# Altium PCB aig2_main.PcbDoc
Units mm, origin at the board's own origin, x right, y up, seen from the top; angles counter-clockwise.
Board outline 97 x 77 mm, 2 copper layers (Top Layer, Bottom Layer); 41 components, 63 nets, 298 pads, 0 vias.
Unrouted connection lines stored in the file: 148.
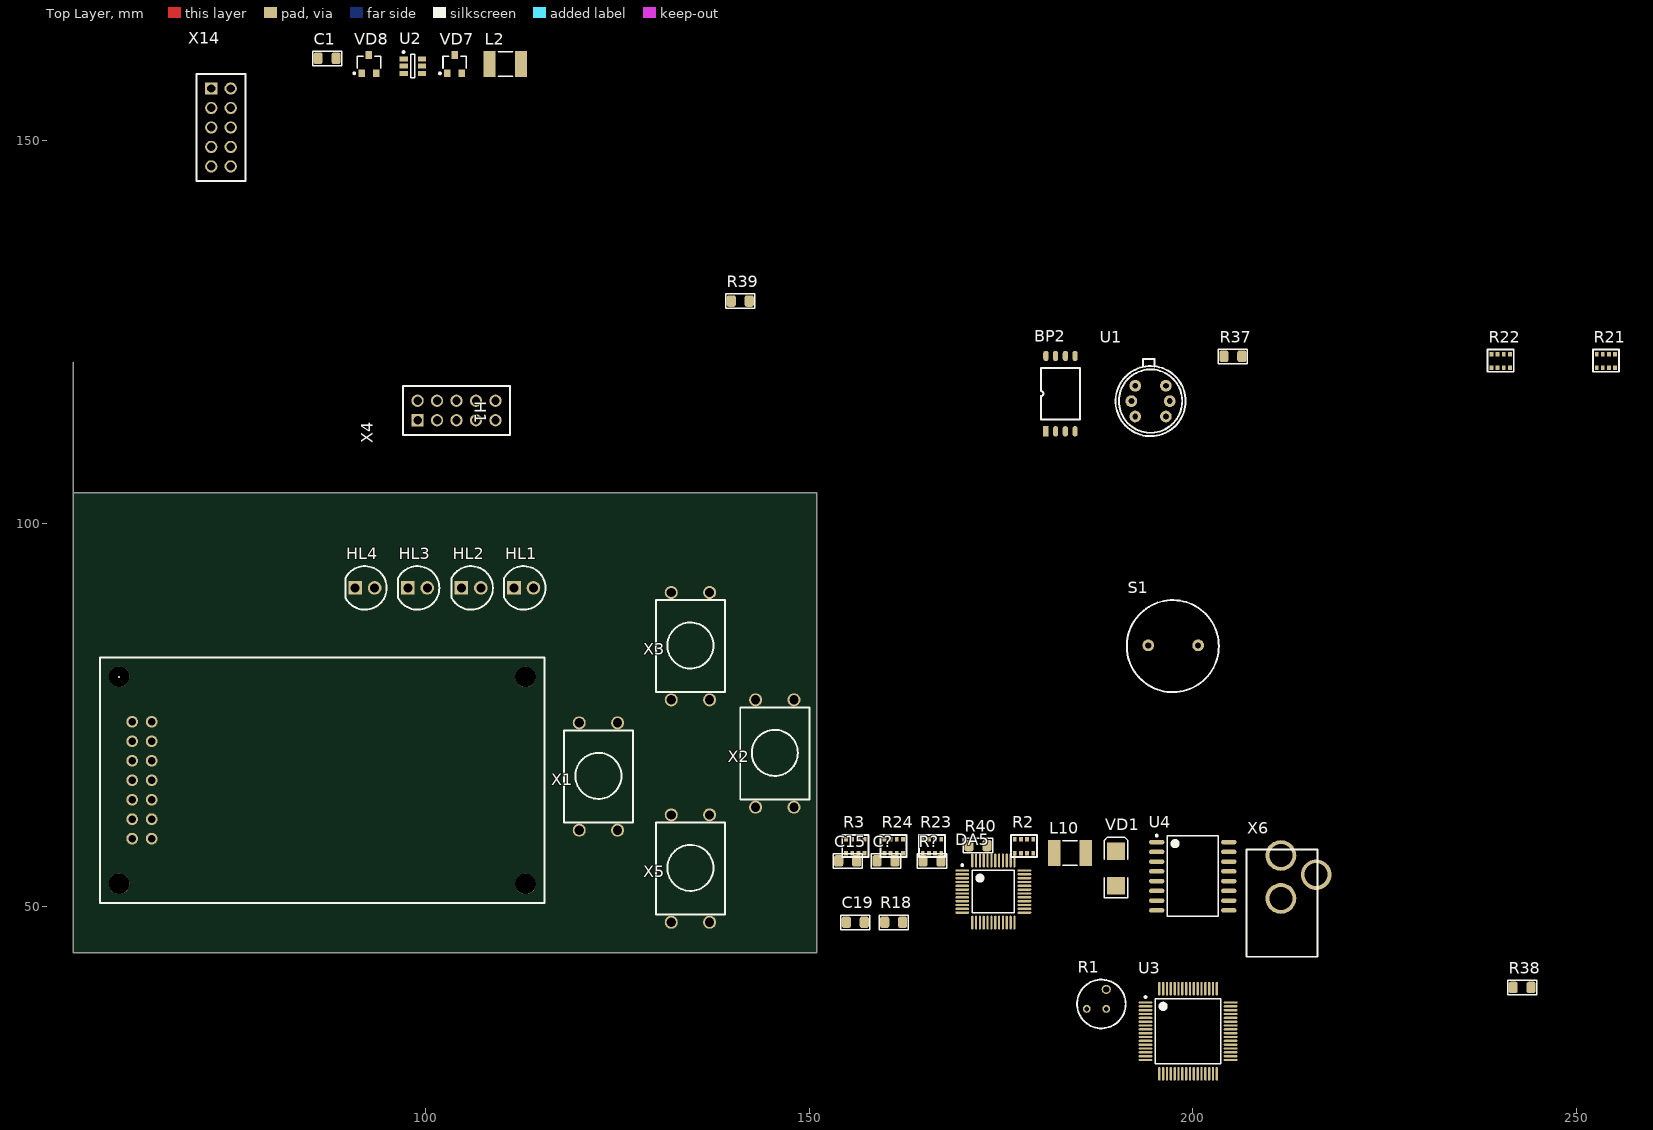
[diagram p0: Top Layer view]
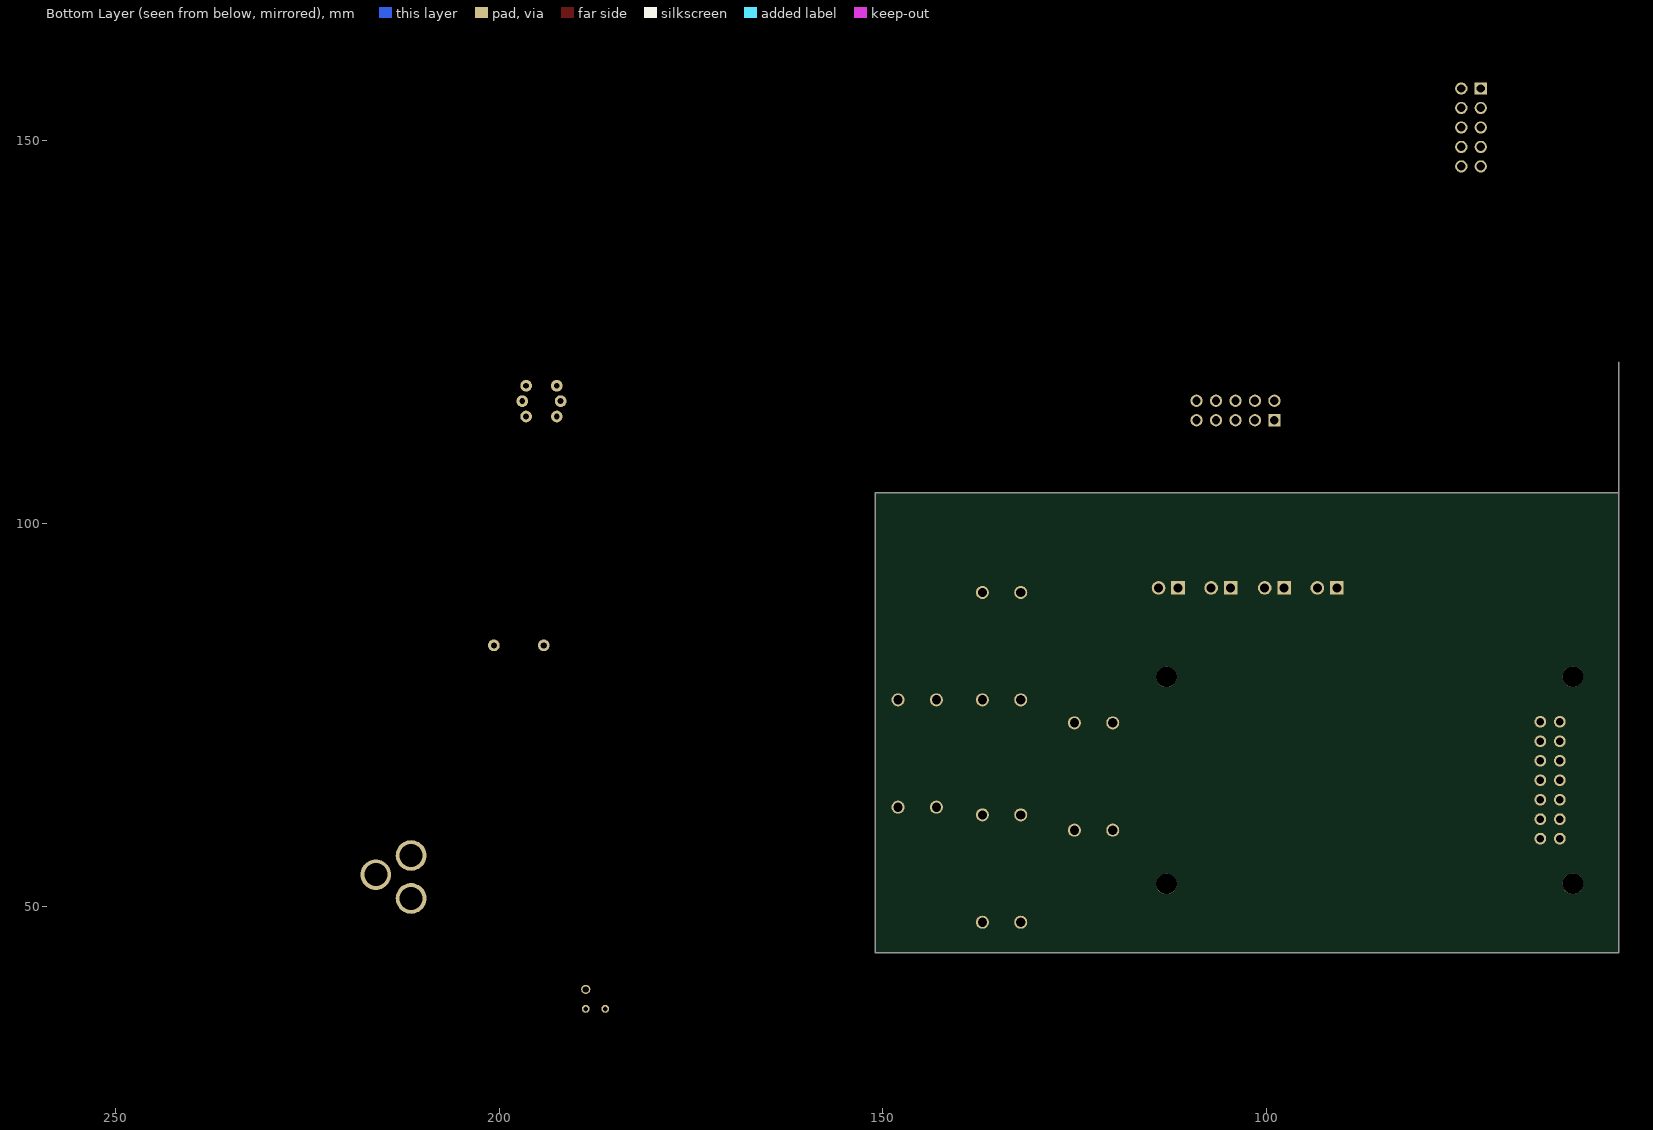
[diagram p1: Bottom Layer view, seen from below]

## Layer stack, top to bottom
Top Layer: signal copper 0.0356
Dielectric: dielectric 0.32, FR-4, Dk 4.8
Bottom Layer: signal copper 0.0356

## Board outline
54,121 54,104 151,104 151,45 151,44 54,44

## Design rules (kind name [scope] priority, off if disabled: settings)
Clearance [All] p1: gap=0.254
PolygonConnect [All] p1: connectstyle=Relief reliefconductorwidth=0.254 reliefentries=4 polygonreliefangle="90 Angle"
RoomDefinition aig2_main [InComponentClass('aig2_main')] p1: confinementstyle=ConfineIn formatcopy=TRUE lockcomponents=FALSE outline 152,46 180,46 180,60 152,60
RoutingVias [All] p1: holewidth=0.711 width=1.27 viastyle="Through Hole" minholewidth=0.711 minwidth=1.27 maxholewidth=0.711 maxwidth=1.27
SilkscreenOverComponentPads [All] p1: minsilkscreentomaskgap=0.254
SolderMaskExpansion [All] p1: expansion=0.102
Width [All] p1: maxlimit=0.254 minlimit=0.254 preferedwidth=0.254
27 further rules are at their usual default settings.

## Components (designator, comment, footprint, x,y, rotation, side; value= is the part's Value field where it differs from the comment)
BP2 "MPX6115A" MPX_SOP8 180.848,112.014 r90 top
C1 "C0805" CC0805 87.122,160.655 r0 top
C15 "C0805" CC0805 155,56 r0 top
C19 "C0805" CC0805 156,48 r0 top
C? "C0805" CC0805 160,56 r0 top
DA5 "STM32F100C8" LQFP48_N 174,52 r0 top
H1 "MT-08S2A" MT-08S2A 72,79 r0 top
HL1 "LED2.54" LED2.54_LED2.54(Primary) 111.489,91.592 r0 top
HL2 "LED2.54" LED2.54_LED2.54(Primary) 104.631,91.592 r0 top
HL3 "LED2.54" LED2.54_LED2.54(Primary) 97.646,91.592 r0 top
HL4 "LED2.54" LED2.54_LED2.54(Primary) 90.788,91.592 r0 top
L2 "CM45" 12-1812 110.363,159.893 r0 top
L10 "CM45" 12-1812 184,57 r0 top
R1 "82p" 82p 186.182,36.703 r0 top
R2 "CAY16-J4" CAY16-F4 178,58 r0 top
R3 "CAY16-J4" CAY16-F4 156,58 r0 top
R18 "" RR0805 161,48 r0 top
R21 "CAY16-J4" CAY16-F4 253.873,121.285 r0 top
R22 "CAY16-J4" CAY16-F4 240.157,121.285 r0 top
R23 "CAY16-J4" CAY16-F4 166,58 r0 top
R24 "CAY16-J4" CAY16-F4 161,58 r0 top
R37 "" RR0805 205.232,121.793 r0 top
R38 "" RR0805 242.951,39.497 r0 top
R39 "" RR0805 141,129 r0 top
R40 "" RR0805 172,58 r0 top
R? "" RR0805 166,56 r0 top
S1 "HCM1201" HCM1201 198,84 r0 top
U1 "HIH-4602L" HIH-4602L 190.5,115.951 r0 top
U2 "LM2736YMK" MK06A_N 98.298,159.639 r0 top
U3 "STM32F103RBT6" LQFP64_N 199.39,33.782 r0 top
U4 "TCA0372DW" 751G-02_N 200,54 r0 top
VD1 "LL5819" SMB 190,55 r90 top
VD7 "BAT54C" SOT23 103.759,159.893 r0 top
VD8 "BAT54C" SOT23 92.583,159.893 r0 top
X1 "SWT-5" SWT-5 120,60 r90 top
X2 "SWT-5" SWT-5 143,63 r90 top
X3 "SWT-5" SWT-5 132,77 r90 top
X4 "IDC10M" idc10_2 98.92,113.46 r90 top
X5 "SWT-5" SWT-5 132,48 r90 top
X6 "DJK-02A" DJK-02A 213,44 r90 top
X14 "IDC10M" idc10_2 72.009,156.718 r0 top

## Footprints (in the part's own frame and the unit in brackets; to place one, negate y for a bottom-side part, rotate by r counter-clockwise, add the part's x,y. Pads: shape width x height; smd on the part's side, far side on the other; paste and mask are expansions set on the pad)
12-1812 [mm] "Chip Resistor; Body 4.5 x 3.2 mm (LxW typ)"
  rect 1.6x3.4 smd: 1(-2.05,0) 2(2.05,0)
  silkscreen extent -0.95,-1.6 0.95,1.6
82p [mil]
  round 40 hole 25: 1(0,0) 2(100,0)
  round 47.24 hole 31.5: 3(100,100)
  silkscreen extent -50,-100 200,150
751G-02_N [mm] "SOIC, 16-Leads, Body 10.3x7.5mm, Pitch 1.27mm, IPC Medium Density"
  oval 2x0.6 smd: 1(-4.7,4.445) 2(-4.7,3.175) 3(-4.7,1.905) 4(-4.7,0.635) 5(-4.7,-0.635) 6(-4.7,-1.905) 7(-4.7,-3.175) 8(-4.7,-4.445) 9(4.7,-4.445) 10(4.7,-3.175) 11(4.7,-1.905) 12(4.7,-0.635) 13(4.7,0.635) 14(4.7,1.905) 15(4.7,3.175) 16(4.7,4.445)
  silkscreen extent -4.82,-5.25 3.3,5.42, body extent -3.8,-5.25 3.8,5.25, height 2.65
CAY16-F4 [mm]
  rect 0.5x0.6 smd: 1(-1.2,-1) 2(-1.2,0.8) 3(-0.4,-1) 4(-0.4,0.8) 5(0.4,-1) 6(0.4,0.8) 7(1.2,-1) 8(1.2,0.8)
  silkscreen extent -1.7,-1.5 1.7,1.4, body extent -1.6,-0.9 1.6,0.7, height 0.5
CC0805 [mm]
  rrect50% 1.2x1.5 smd: 1(-1.17,0) 2(1.17,0)
  silkscreen extent -1.9,-0.96 1.9,0.94, body extent -1.03,-0.62 0.97,0.63, height 0.78
DJK-02A [mm]
  round 4 hole 3: 1(7.1,1.5) 2(12.7,1.5) 3(10.2,-3.1)
  silkscreen extent -0.5,-3.25 13.5,6, body extent -0.5,-3.3 13.5,6, height 11
HCM1201 [mm]
  round 1.524 hole 0.8: 1(-3.8,0.1) 2(2.7,0.1)
  silkscreen extent -6.6,-6 5.4,6, body extent -6.61,-5.9 5.39,6.1, height 8.5
HIH-4602L [mil]
  round 60 hole 30: 1(78.74,78.74) 2(59.06,0) 3(78.74,-78.74) 4(236.22,-78.74) 5(255.91,0) 6(236.22,78.74)
  silkscreen extent -22,-180 337,217, body extent -113,-294 451,270, height 243
idc10_2 [mm]
  rect 1.6x1.6 hole 1.1: 1(0,0)
  round 1.6 hole 1.1: 2(2.54,0) 3(0,-2.54) 4(2.54,-2.54) 5(0,-5.08) 6(2.54,-5.08) 7(0,-7.62) 8(2.54,-7.62) 9(0,-10.16) 10(2.54,-10.16)
  silkscreen extent -1.91,-12.06 4.45,1.91, body extent -3.26,-15.29 5.94,5.07, height 8.84
LED2.54_LED2.54(Primary) [mil]
  rect 70x70 hole 46: 1(0,0)
  round 70 hole 46: 2(100,0)
  silkscreen extent -50,-112 162,112, body extent -49,-112 163,116, height 315
LQFP48_N [mm] "Thin QFP, 48-Leads, Body 7x7mm, Pitch 0.5mm, IPC Medium Density"
  oval 1.8x0.3 smd: 1(-4.05,2.75) 2(-4.05,2.25) 3(-4.05,1.75) 4(-4.05,1.25) 5(-4.05,0.75) 6(-4.05,0.25) 7(-4.05,-0.25) 8(-4.05,-0.75) 9(-4.05,-1.25) 10(-4.05,-1.75) 11(-4.05,-2.25) 12(-4.05,-2.75) 25(4.05,-2.75) 26(4.05,-2.25) 27(4.05,-1.75) 28(4.05,-1.25) 29(4.05,-0.75) 30(4.05,-0.25) 31(4.05,0.25) 32(4.05,0.75) 33(4.05,1.25) 34(4.05,1.75) 35(4.05,2.25) 36(4.05,2.75)
  oval 0.3x1.8 smd: 13(-2.75,-4.05) 14(-2.25,-4.05) 15(-1.75,-4.05) 16(-1.25,-4.05) 17(-0.75,-4.05) 18(-0.25,-4.05) 19(0.25,-4.05) 20(0.75,-4.05) 21(1.25,-4.05) 22(1.75,-4.05) 23(2.25,-4.05) 24(2.75,-4.05) 37(2.75,4.05) 38(2.25,4.05) 39(1.75,4.05) 40(1.25,4.05) 41(0.75,4.05) 42(0.25,4.05) 43(-0.25,4.05) 44(-0.75,4.05) 45(-1.25,4.05) 46(-1.75,4.05) 47(-2.25,4.05) 48(-2.75,4.05)
  silkscreen extent -4.17,-2.75 2.75,3.57, body extent -3.5,-3.5 3.5,3.5, height 1.6
LQFP64_N [mm] "Thin QFP, 64-Leads, Body 10x10mm, Pitch 0.5mm, IPC Medium Density"
  oval 1.8x0.3 smd: 1(-5.55,3.75) 2(-5.55,3.25) 3(-5.55,2.75) 4(-5.55,2.25) 5(-5.55,1.75) 6(-5.55,1.25) 7(-5.55,0.75) 8(-5.55,0.25) 9(-5.55,-0.25) 10(-5.55,-0.75) 11(-5.55,-1.25) 12(-5.55,-1.75) 13(-5.55,-2.25) 14(-5.55,-2.75) 15(-5.55,-3.25) 16(-5.55,-3.75) 33(5.55,-3.75) 34(5.55,-3.25) 35(5.55,-2.75) 36(5.55,-2.25) 37(5.55,-1.75) 38(5.55,-1.25) 39(5.55,-0.75) 40(5.55,-0.25) 41(5.55,0.25) 42(5.55,0.75) 43(5.55,1.25) 44(5.55,1.75) 45(5.55,2.25) 46(5.55,2.75) 47(5.55,3.25) 48(5.55,3.75)
  oval 0.3x1.8 smd: 17(-3.75,-5.55) 18(-3.25,-5.55) 19(-2.75,-5.55) 20(-2.25,-5.55) 21(-1.75,-5.55) 22(-1.25,-5.55) 23(-0.75,-5.55) 24(-0.25,-5.55) 25(0.25,-5.55) 26(0.75,-5.55) 27(1.25,-5.55) 28(1.75,-5.55) 29(2.25,-5.55) 30(2.75,-5.55) 31(3.25,-5.55) 32(3.75,-5.55) 49(3.75,5.55) 50(3.25,5.55) 51(2.75,5.55) 52(2.25,5.55) 53(1.75,5.55) 54(1.25,5.55) 55(0.75,5.55) 56(0.25,5.55) 57(-0.25,5.55) 58(-0.75,5.55) 59(-1.25,5.55) 60(-1.75,5.55) 61(-2.25,5.55) 62(-2.75,5.55) 63(-3.25,5.55) 64(-3.75,5.55)
  silkscreen extent -5.67,-4.25 4.25,4.57, body extent -5,-5 5,5, height 1.6
MK06A_N [mm] "SOT23, 6-Leads, Body 3.0x1.7mm, Pitch 0.95mm, Lead Span 2.9mm, IPC Medium Density"
  rect 1.1x0.65 smd: 1(-1.2,0.95) 2(-1.2,0) 3(-1.2,-0.95) 4(1.2,-0.95) 5(1.2,0) 6(1.2,0.95)
  silkscreen extent -1.32,-1.55 0.25,1.95, body extent -0.9,-1.55 0.9,1.55, height 1
MPX_SOP8 [mil]
  rect 53x27 smd: 1(0,0)
  oval 53x27 smd: 2(0,-50) 3(0,-100) 4(0,-150) 5(387,-150) 6(387,-100) 7(387,-50) 8(387,0)
  silkscreen extent 62,-175 326,25, body extent -43,-219 429,69, height 380
MT-08S2A [mm]
  round 2.7 hole 2.7: 0(-12,-26) 0(-12,1) 0(41,-26) 0(41,1)
  round 1.524 hole 0.965: 1(-10.3,-20.1) 2(-7.76,-20.1) 3(-10.3,-17.56) 4(-7.76,-17.56) 5(-10.3,-15.02) 6(-7.76,-15.02) 7(-10.3,-12.48) 8(-7.76,-12.48) 9(-10.3,-9.94) 10(-7.76,-9.94) 11(-10.3,-7.4) 12(-7.76,-7.4) 13(-10.3,-4.86) 14(-7.76,-4.86)
  silkscreen extent -14.5,-28.5 43.5,3.5
RR0805 [mm]
  rrect50% 1.2x1.5 smd: 1(-1.17,0) 2(1.17,0)
  silkscreen extent -1.9,-0.96 1.9,0.94, body extent -1,-0.62 1,0.62, height 0.78
SMB [mm] "DO-214-AA/SMB; 2 C-Bend Leads; Body 5.3 x 3.6 mm, inc. leads (LxW)"
  rect 2.3x2.3 smd: 1(-2.25,0) 2(2.25,0)
  silkscreen extent -3.8,-1.55 4.1,1.55
SOT23 [mm]
  rect 0.85x1 smd: 1(-0.95,-1.2) 2(0.95,-1.2) 3(0,1.2)
  silkscreen extent -2.05,-1.32 1.52,1.02, body extent -1.45,-1.21 1.45,1.21, height 0.99
SWT-5 [mm]
  round 1.7 hole 1.2: 1(0,0) 2(14,0) 3(0,-5) 4(14,-5)
  silkscreen extent 1,-7 13,2

## Part data
BP2: library part MPXH6115A, "Микросхема"
C1 C15 C19 C?: "Ceramic Chip Capacitor - Standard"
DA5: library part STM32F101C6T6, "STM32 ARM-based 32-bit MCU with 32 Kbytes Flash, 48-pin LQFP, Industrial Temperature"
H1: "Индикатор  ЖК"
L2 L10: library part ERJL12, "Дроссель"
R1: "Резистор"
R18 R?: library part R_0805, "R_0805"
R37 R38 R39 R40: library part R_0805, "Резистор"
S1: "ПьезоБуззер"
U1: "Датчик влажности"
U2: "Thin SOT23 750mA Load Step-Down DC-DC Regulator"
U3: "STM32 ARM-based 32-bit MCU with 128 Kbytes Flash, 64-pin LQFP, Industrial Temperature"
U4: "Dual Power Operational Amplifier"
VD1: library part 10BQ060, "Schottky Rectifier"
VD7 VD8: "Schottky Barrier Double Diode"
X1 X2 X3 X5: "Кнопка"
X4 X14: library part "09 18 110 9621", "Flat Cable Connector (IDC), PCB Transition Connector, 2 Rows, Solder Pin, 10 Contacts"
X6: "Разъем"

## Nets (pads, with @x,y where several pads share a name; then routed paths per layer and width w, separated by ;. In a path a pad name is that pad's centre, name@x,y a point inside that pad or via, vN(x,y) a via of type N, cw(c..) or ccw(c..) an arc to the next point about the centre after c; other vN are vias at no path point)
+3.3V: C15.2 DA5.1 DA5.9 DA5.24 DA5.36 DA5.48 H1.2 L2.1 R18.1 R38.1 R?.1 U3.1 U3.13 U3.19 U3.32 U3.48 U3.64 X14.1
+5V_ADC: BP2.2 U1.4
+EGB: R2.2 R2.4 R2.6 R2.8 R40.1 U2.4 U2.5 U4.7 VD7.1 X4.9
A0: DA5.2 H1.4
BUT1: R22.3
BUT2: R22.1
BUT3: R22.7
BUT4: R22.5
BUZZER: S1.1
CHARGE_CS: DA5.13 R24.4
CHARGE_PWM+: DA5.41 R3.8 U3.36 U4.9
CHARGE_PWM-: DA5.40 R3.6 U3.35 U4.10
CS: R2.1 R2.3 R2.5 R2.7 U4.8 VD1.2
DB0: DA5.45 H1.7
DB1: DA5.46 H1.8
DB2: DA5.21 H1.9
DB3: DA5.22 H1.10
DB4: DA5.26 H1.11
DB5: DA5.25 H1.12
DB6: DA5.27 H1.13
DB7: DA5.28 H1.14
EMU: DA5.4 DA5.10 H1.6 X4.1
GND: BP2.3 C15.1 C19.1 C?.1 DA5.8 DA5.23 DA5.35 DA5.44 DA5.47 H1.1 HL1.1 HL2.1 HL3.1 HL4.1 R1.3 R3.1 R3.3 R3.5 R3.7 R23.5 R24.5 R37.2 R39.2 S1.2 U1.1 U1.3 U3.12 U3.18 U3.31 U3.47 U3.60 U3.63 U4.4 U4.5 U4.12 U4.13 VD8.2 X1.4 X2.4 X3.4 X4.3 X4.6 X5.4 X6.1 X14.3 X14.5 X14.9
HUMIDITY: DA5.11 R37.1 U1.2
LED1: R21.3
LED2: R21.1
LED3: R21.7
LED4: R21.5
NetC1_1: C1.1 L2.2 U2.6 VD8.3
NetC1_2: C1.2 U2.1 VD7.3
NetH1_3: H1.3 R1.1 R1.2
NetHL1_2: HL1.2 R21.8
NetHL2_2: HL2.2 R21.6
NetHL3_2: HL3.2 R21.4
NetHL4_2: HL4.2 R21.2
NetL10_1: L10.1 VD1.1
NetL10_2: L10.2 U4.16
NetR22_2: R22.2 X5.1
NetR22_4: R22.4 X3.1
NetR22_6: R22.6 X2.1
NetR22_8: R22.8 X1.1
NetR23_1: R23.1 R23.7
NetR23_6: R23.6 R23.8
NetR24_1: R24.1 R24.7
NetR24_3: R24.3 R40.2 U4.2
NetR24_6: R24.6 R24.8
NetR38_2: R38.2 R39.1 U2.3
P_F: DA5.33 X4.5
P_I: DA5.32 X4.7
PRESSURE: BP2.4 DA5.12
R\E\S\E\T\: C19.2 C?.2 DA5.7 R18.2 R?.2 U3.7 X14.10
RS485_N: X4.4
RS485_P: X4.2
RTD: U1.5 U1.6
RW: DA5.3 H1.5
RX: DA5.31 X4.10
TCK: DA5.37 U3.49 X14.4
TDI: DA5.38 U3.50 X14.8
TDO: DA5.39 U3.55 X14.6
TMS: DA5.34 U3.46 X14.2
TX: DA5.30 X4.8
VIN: R23.3 U4.1 X6.2
VIN_SENSE: DA5.14 R23.4
pads on no net: BP2.1 BP2.5 BP2.6 BP2.7 BP2.8 DA5.5 DA5.6 DA5.15 DA5.16 DA5.17 DA5.18 DA5.19 DA5.20 DA5.29 DA5.42 DA5.43 H1.0 R3.2 R3.4 R23.2 R24.2 U2.2 U3.2 U3.3 U3.4 U3.5 U3.6 U3.8 U3.9 U3.10 U3.11 U3.14 U3.15 U3.16 U3.17 U3.20 U3.21 U3.22 U3.23 U3.24 U3.25 U3.26 U3.27 U3.28 U3.29 U3.30 U3.33 U3.34 U3.37 U3.38 U3.39 U3.40 U3.41 U3.42 U3.43 U3.44 U3.45 U3.51 U3.52 U3.53 U3.54 U3.56 U3.57 U3.58 U3.59 U3.61 U3.62 U4.3 U4.6 U4.11 U4.14 U4.15 VD7.2 VD8.1 X1.2 X1.3 X2.2 X2.3 X3.2 X3.3 X5.2 X5.3 X6.3 X14.7